# Altium PCB arduinoNano.PcbDoc
Units mm, origin at the board's own origin, x right, y up, seen from the top; angles counter-clockwise.
Board outline 18.54 x 43.18 mm, 2 copper layers (Top Layer, Bottom Layer); 23 components, 42 nets, 160 pads, 35 vias.
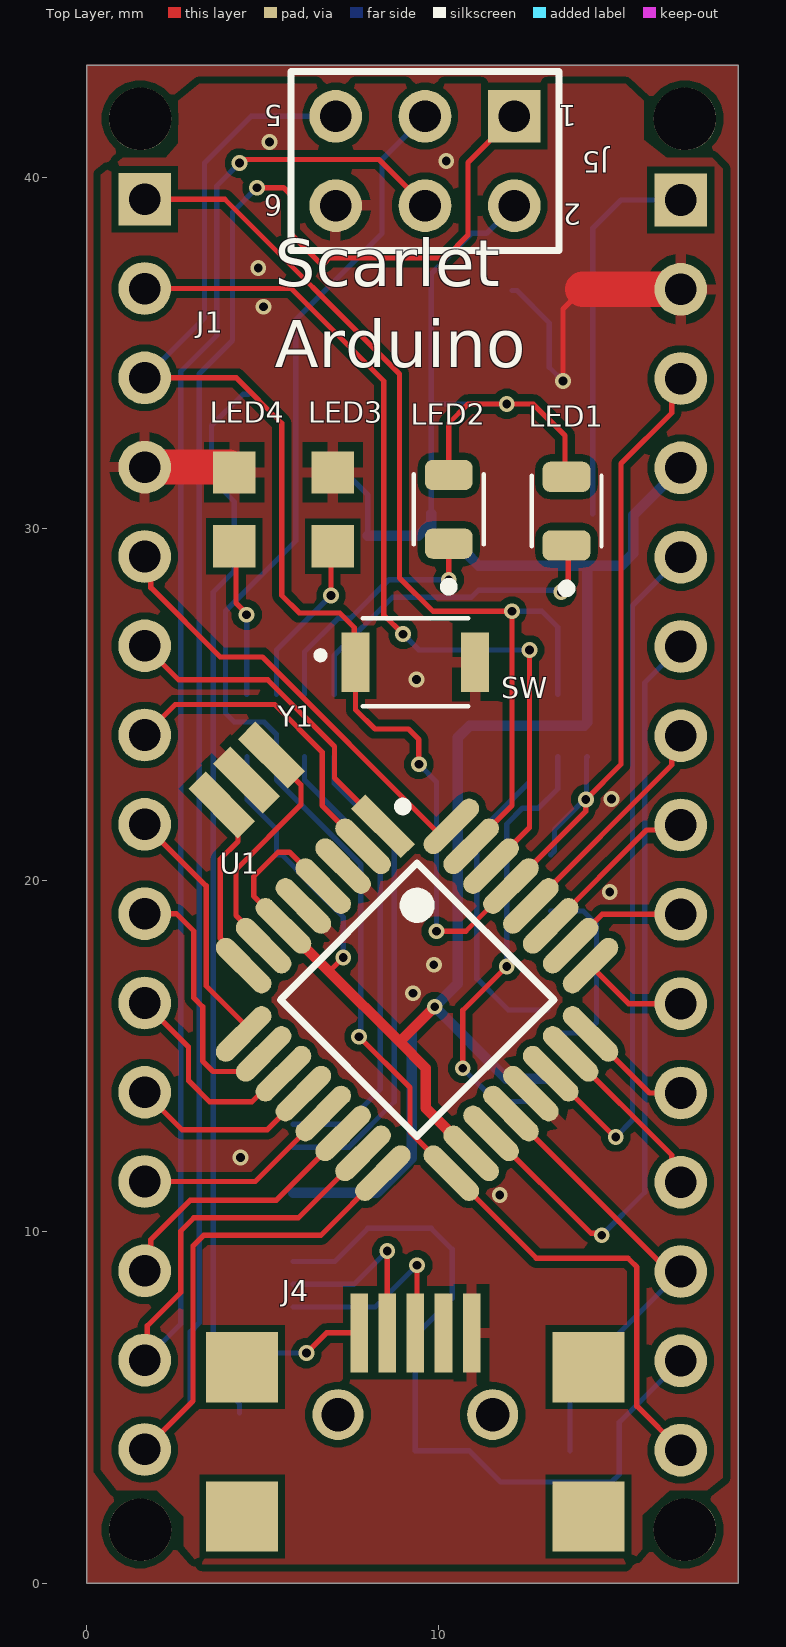
[diagram p0: Top Layer view]
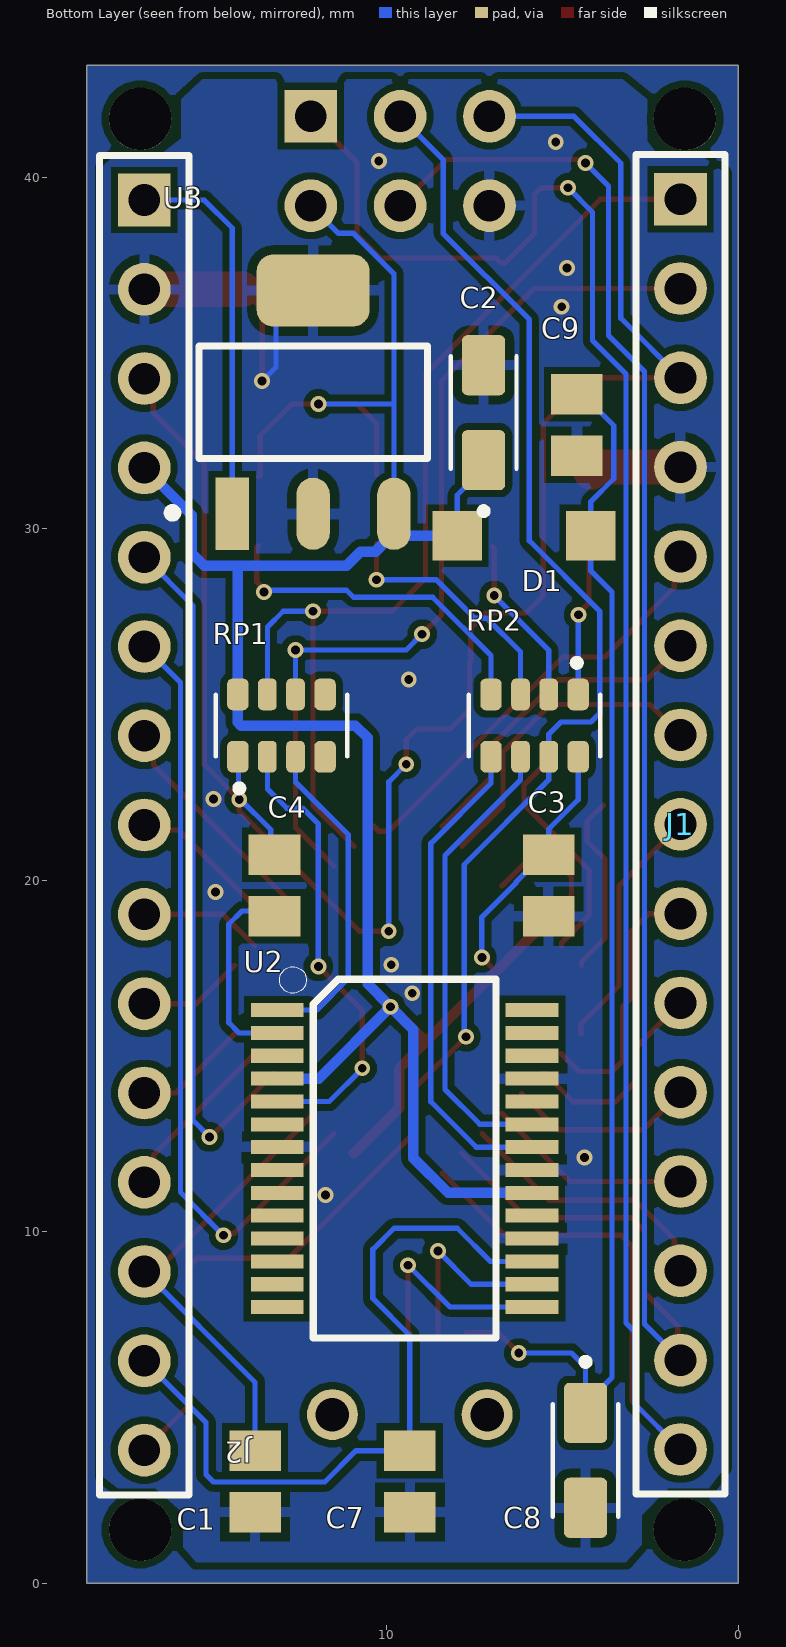
[diagram p1: Bottom Layer view, seen from below]
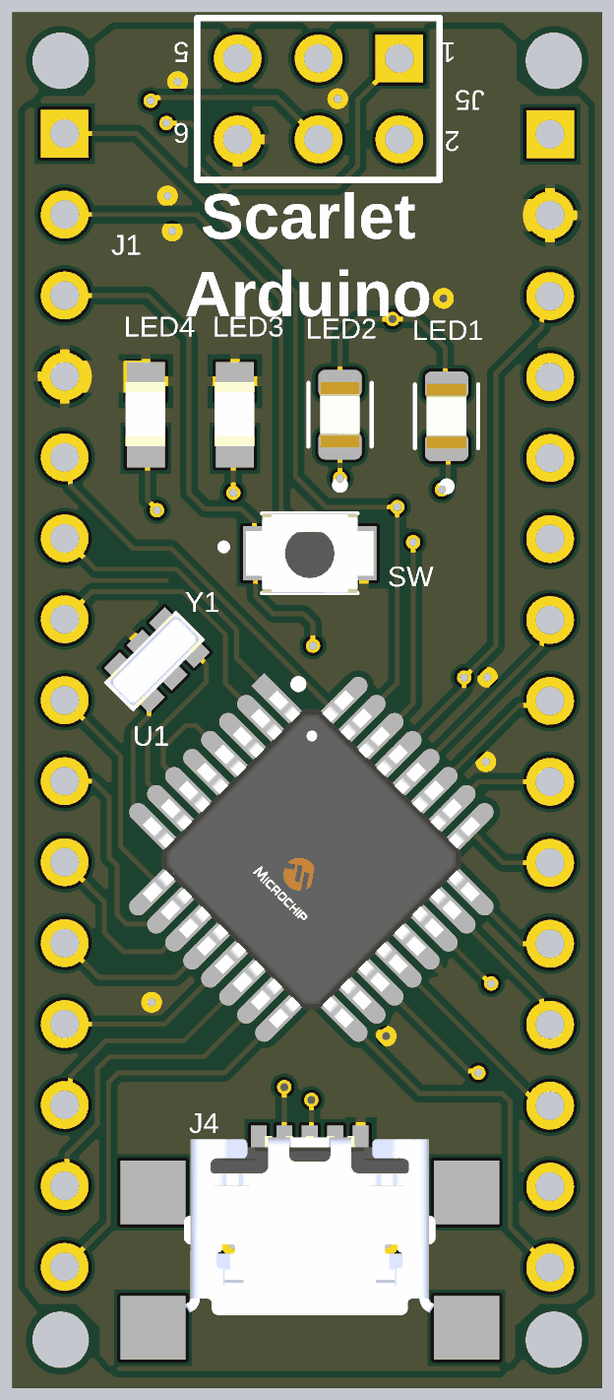
[diagram p2: 3D render of the assembled board from above, using the file's embedded part models]
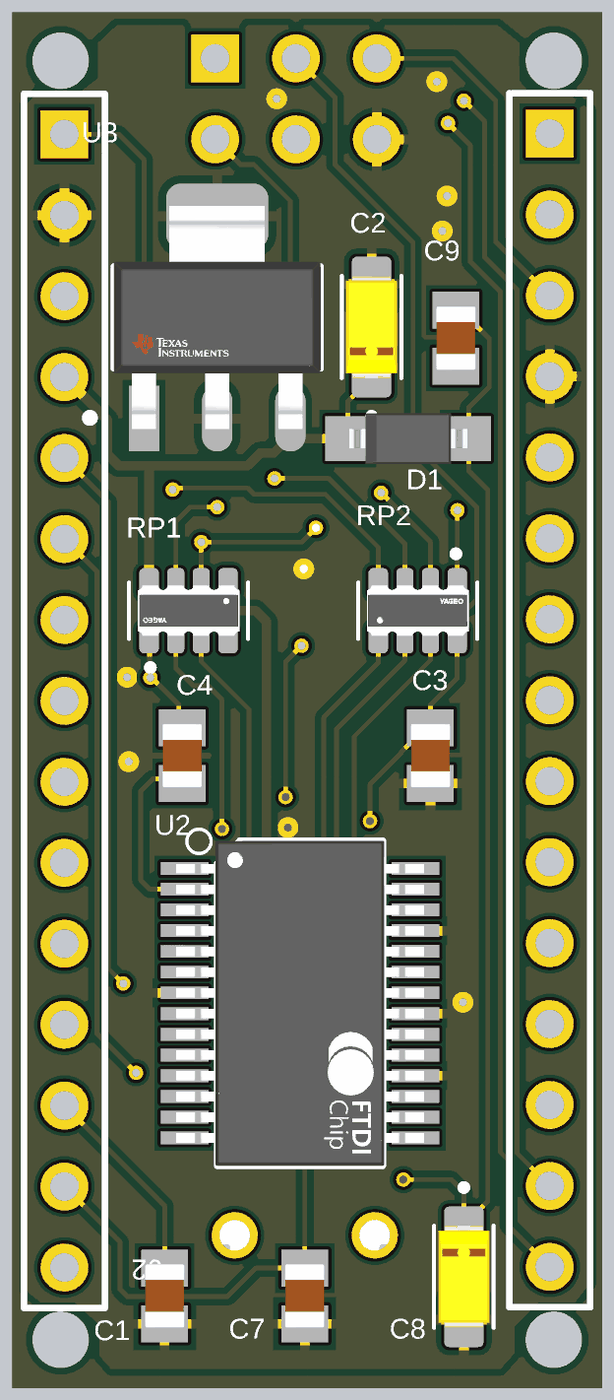
[diagram p3: 3D render of the assembled board from below, using the file's embedded part models]

## Layer stack, top to bottom
Top Solder: solder mask 0.0102, Solder Resist, Dk 3.5
Top Layer: signal copper 0.0356
Dielectric 1: dielectric 0.32, FR-4, Dk 4.8
Bottom Layer: signal copper 0.0356
Bottom Solder: solder mask 0.0102, Solder Resist, Dk 3.5

## Board outline
0,0 18.542,0 18.542,43.18 0,43.18

## Design rules (kind name [scope] priority, off if disabled: settings)
Clearance [All] p1: gap=0.2 ignorepadtopadclearanceinfootprint=FALSE except(0: Arc-Hole Track-Hole SMDPad-Hole THPad-Hole Via-Hole Fill-Hole Poly-Hole Region-Hole Text-Hole)
MinimumSolderMaskSliver [All] p1: minsoldermaskwidth=0
PolygonConnect [All] p1: thpad.connectstyle=Relief thpad.reliefconductorwidth=0.3 thpad.reliefentries=4 thpad.polygonreliefangle="90 Angle" thpad.airgapwidth=0.254 smdpad.connectstyle=Relief smdpad.reliefconductorwidth=0.3 smdpad.reliefentries=4 smdpad.polygonreliefangle="90 Angle" smdpad.airgapwidth=0.254 via.connectstyle=Direct via.reliefconductorwidth=0.254 via.reliefentries=4 via.polygonreliefangle="90 Angle" via.airgapwidth=0.254
RoutingVias [All] p1: holewidth=0.25 width=0.45 viastyle="Through Hole" minholewidth=0.2 minwidth=0.4 maxholewidth=0.7 maxwidth=0.9
SilkToSilkClearance [All] p1: silktosilkclearance=0
SilkToSolderMaskClearance [IsPad] p1: minsilkscreentomaskgap=0 clearancetoexposedcopper=TRUE
SolderMaskExpansion [All] p1: expansion=0.102 istentingtop=FALSE
Width [All] p1: maxlimit=8 minlimit=0.15 preferedwidth=0.15 minimp=50.000000 maximp=50.000000 favimp=50.000000
27 further rules are at their usual default settings.

## Components (designator, comment, footprint, x,y, rotation, side; value= is the part's Value field where it differs from the comment)
C1 "C0805C104K5RACTU" CAPC2012X88N 13.75,2.9 r270 bottom value=0.1uF
C2 "T491A475K010AT, 4.7uF" CAPMP3216X180N 7.25,33.3 r90 bottom value=4.7uF
C3 "C0805C104K5RACTU" CAPC2012X88N 5.4,19.85 r270 bottom value=0.1uF
C4 "C0805C104K5RACTU" CAPC2012X88N 13.2,19.85 r270 bottom value=0.1uF
C7 "C0805C104K5RACTU" CAPC2012X88N 9.35,2.9 r270 bottom value=0.1uF
C8 "T491A475K010AT, 4.7uF" CAPMP3216X180N 4.35,3.5 r270 bottom value=4.7uF
C9 "C0805C104K5RACTU" CAPC2012X88N 4.6,32.95 r270 bottom value=0.1uF
D1 "MBR0520LT1G" SOD3716X117(SOD-123) 6.1,29.75 r180 bottom
J1 "Header 15" HDR1X15 1.651,39.37 r270 bottom
J2 "Header 15" HDR1X15 16.9,39.35 r270 bottom
J4 "67503-1020" 67503-1020 9.35,-1.1 r90 top
J5 "Header 3X2" HDR2X3 12.165,41.729 r180 top
LED1 "APT2012SRCPRV" LEDC2012X75N 13.65,30.5 r90 top
LED2 "APT2012SRCPRV" LEDC2012X75N 10.3,30.55 r90 top
LED3 "APHCM2012SECK-F01" DIOC200X125X110 7,30.55 r270 top
LED4 "LTST-C170TBKT" DIOC200X125X110 4.2,30.55 r270 top
RP1 "YC164-JR-071KL" RESCAXE80P320X160X70-8N 13,24.4 r90 bottom
RP2 "YC164-JR-07680RL" RESCAXE80P320X160X70-8N 5.8,24.4 r270 bottom
SW "B3U-1000P" SW_B3U-1000P 9.35,26.2 r0 top
U1 "ATMEGA168-20AU" Microchip_32A_IPC_A 9.4,16.6 r315 top
U2 "FT232RL" SSOP28-0.65-10.2X5.2MM 9.498,12.083 r270 bottom
U3 "UA78M05CDCYRG3" Texas_Instruments_DCY0004A_IPC_A 12.1,33.6 r90 bottom
Y1 "CSTCE16M0V53" CSTCE16M0V53 4.472,22.824 r225 top

## Footprints (in the part's own frame and the unit in brackets; to place one, negate y for a bottom-side part, rotate by r counter-clockwise, add the part's x,y. Pads: shape width x height; smd on the part's side, far side on the other; paste and mask are expansions set on the pad)
67503-1020 [mm]
  rect 2.25x0.5 smd: 1(8.225,1.6) 2(8.225,0.8) 3(8.225,0) 4(8.225,-0.8) 5(8.225,-1.6)
  round 1.45 hole 0.95: 6(5.9,2.2) 7(5.9,-2.2)
  rect 2x2.05 smd: 8(3,-4.925) 9(7.25,-4.925) 10(7.25,4.925) 11(3,4.925)
  body extent 3.4,-3.95 9.02,3.95, height 2.8
CAPC2012X88N [mm]
  rect 1.16x1.47 smd: 1(-0.875,0) 2(0.875,0)
  body extent -1,-0.63 1,0.63, height 0.88
CAPMP3216X180N [mm]
  rrect25% 1.71x1.23 smd: 1(-1.35,0) 2(1.35,0)
  silkscreen extent -2.9,-0.93 1.6,0.93, body extent -1.6,-0.8 1.6,0.8, height 1.8
CSTCE16M0V53 [mm]
  rect 0.7x2 smd: 1(-1.074,0.037) 2(-0.074,0.037) 3(0.926,0.037)
  body extent -1.6,-0.65 1.6,0.65, height 1
DIOC200X125X110 [mm]
  rect 1.2x1.2 smd: NEG(-1.05,0) POS(1.05,0)
  body extent -1.02,-0.64 0.98,0.61, height 1.1
HDR1X15 [mm] "Connector; Header; 15 Position"
  rect 1.5x1.5 hole 0.9: 1(0,0)
  round 1.5 hole 0.9: 2(2.54,0) 3(5.08,0) 4(7.62,0) 5(10.16,0) 6(12.7,0) 7(15.24,0) 8(17.78,0) 9(20.32,0) 10(22.86,0) 11(25.4,0) 12(27.94,0) 13(30.48,0) 14(33.02,0) 15(35.56,0)
  silkscreen extent -1.27,-1.27 36.83,1.27
HDR2X3 [mm] "Connector; Header; 3x2 Position"
  rect 1.5x1.5 hole 0.9: 1(0,0)
  round 1.5 hole 0.9: 2(0,2.54) 3(2.54,0) 4(2.54,2.54) 5(5.08,0) 6(5.08,2.54)
  silkscreen extent -1.27,-1.27 6.35,3.81
LEDC2012X75N [mm]
  rrect50% 0.86x1.36 smd: A(0.975,0) C(-0.975,0)
  silkscreen extent -2.3,-0.99 1,0.99, body extent -1.02,-0.62 1.02,0.63, height 0.75
Microchip_32A_IPC_A [mm]
  rect 2.004x0.566 smd paste+0 mask+0: 1(-4.175,2.8)
  rrect100% 2.004x0.566 smd paste+0 mask+0: 2(-4.175,2) 3(-4.175,1.2) 4(-4.175,0.4) 5(-4.175,-0.4) 6(-4.175,-1.2) 7(-4.175,-2) 8(-4.175,-2.8) 17(4.175,-2.8) 18(4.175,-2) 19(4.175,-1.2) 20(4.175,-0.4) 21(4.175,0.4) 22(4.175,1.2) 23(4.175,2) 24(4.175,2.8)
  rrect100% 0.566x2.004 smd paste+0 mask+0: 9(-2.8,-4.175) 10(-2,-4.175) 11(-1.2,-4.175) 12(-0.4,-4.175) 13(0.4,-4.175) 14(1.2,-4.175) 15(2,-4.175) 16(2.8,-4.175) 25(2.8,4.175) 26(2,4.175) 27(1.2,4.175) 28(0.4,4.175) 29(-0.4,4.175) 30(-1.2,4.175) 31(-2,4.175) 32(-2.8,4.175)
  silkscreen extent -4.3,-2.75 2.75,3.72, body extent -5.68,-5.68 5.68,5.68, height 0.25
RESCAXE80P320X160X70-8N [mm]
  rrect50% 0.9x0.61 smd: 1(-0.885,1.24) 4(-0.885,-1.24) 5(0.885,-1.24) 8(0.885,1.24)
  rrect50% 0.9x0.53 smd: 2(-0.885,0.4) 3(-0.885,-0.4) 6(0.885,-0.4) 7(0.885,0.4)
  silkscreen extent -1.88,-1.87 0.88,1.87, body extent -0.8,-1.6 0.8,1.6, height 0.7
SOD3716X117(SOD-123) [mm]
  rect 1.4x1.4 smd: 1(-1.9,0.051) 2(1.9,0.051)
  body extent -1.86,-0.75 1.85,0.85, height 1.35
SSOP28-0.65-10.2X5.2MM [mm]
  rect 0.4x1.5 smd: 1(-4.225,-3.625) 2(-3.575,-3.625) 3(-2.925,-3.625) 4(-2.275,-3.625) 5(-1.625,-3.625) 6(-0.975,-3.625) 7(-0.325,-3.625) 8(0.325,-3.625) 9(0.975,-3.625) 10(1.625,-3.625) 11(2.275,-3.625) 12(2.925,-3.625) 13(3.575,-3.625) 14(4.225,-3.625) 15(4.225,3.625) 16(3.575,3.625) 17(2.925,3.625) 18(2.275,3.625) 19(1.625,3.625) 20(0.975,3.625) 21(0.325,3.625) 22(-0.325,3.625) 23(-0.975,3.625) 24(-1.625,3.625) 25(-2.275,3.625) 26(-2.925,3.625) 27(-3.575,3.625) 28(-4.225,3.625)
  silkscreen extent -5.46,-3.56 5.1,2.6, body extent -5.1,-3.9 5.1,3.9, height 2
SW_B3U-1000P [mm]
  rect 0.8x1.7 smd: 1(-1.7,0) 2(1.7,0)
  silkscreen extent -2.8,-1.25 1.5,1.25, body extent -2,-1.25 2,1.25, height 1.75
Texas_Instruments_DCY0004A_IPC_A [mm]
  rect 2.054x0.953 smd paste+0 mask+0: 1(-3.175,2.3)
  rrect100% 2.054x0.953 smd paste+0 mask+0: 2(-3.175,0) 3(-3.175,-2.3)
  rrect46% 2.054x3.212 smd paste+0 mask+0: 4(3.175,0)
  silkscreen extent -3.27,-3.25 1.6,4.13, body extent -3.5,-3.25 3.5,3.25, height 1.8

## Part data
C1 C3 C4 C7 C9: "SMD 0805 CERAMIC X7R -55^+125 100 NF +/-10? 50V", Package=None, Availability=Unavailable, MF="{'manufacturer': u'KEMET'}", MP=C0805C104K5RACTU, Price=None
C2 C8: library part T491A475K010AT, "4.7ÂµF Molded Tantalum Capacitors 25V 1206 (3216 Metric) 6Ohm", Package=None, Availability=Unavailable, MF="{'manufacturer': u'KEMET'}", MP=T491A475K010AT, Price=None
D1: "Surface Mount Schottky Power Rectifier Plastic SODâˆ’123 Package", Package=None, Availability=Unavailable, MF="{'manufacturer': u'ON Semiconductor'}", MP=MBR0520LT1G, Price=None
J1 J2: "Header, 15-Pin", LatestRevisionDate=17-Jul-2002, LatestRevisionNote="Re-released for DXP Platform.", Publisher="Altium Limited"
J4: "<b>0.8mm USB OTG Mini B SMT R/A Sol Tab Molex On-The-Go Series Right Angle SMT Version 2.0 Type B Mini USB Connector,  Receptacle, 30 V ac/dc, 1A</b><p> </b><br><a href=\"<br><a href=\"https://componentsearchengine.com/Images/3/67503-1020.jpg\" title=\"Image\"> <img src=\"https://componentsearchengine.com/Images/3/67503-1020.jpg\" width=\"150\"></a><p> Source: <a href=\"http://docs-europe.electrocomponents.com/webdocs/13c4/0900766b813c46de.pdf\"> Datasheet </a>", Package=None, Availability=Unavailable, MF="{'manufacturer': u'Molex'}", MP=67503-1020, Price=None
J5: "Header, 3-Pin, Dual row", LatestRevisionDate=17-Jul-2002, LatestRevisionNote="Re-released for DXP Platform.", Publisher="Altium Limited"
LED1 LED2: "2.0X1.2MM,RED SMD LED", Package=None, Availability=Unavailable, MF="{'manufacturer': u'Kingbright'}", MP=APT2012SRCPRV, Price=None
LED3: library part LTST-C170TBKT, "Green 2 x 1.25 x 1.1 mm 130Â° Water Clear 35 mcd 2 V Surface Mount LED", Package=None, Availability=Unavailable, MF="{'manufacturer': u'Lite-On Inc.'}", MP=LTST-C170TBKT, Price=None
LED4: "Green 2 x 1.25 x 1.1 mm 130Â° Water Clear 35 mcd 2 V Surface Mount LED", Package=None, Availability=Unavailable, MF="{'manufacturer': u'Lite-On Inc.'}", MP=LTST-C170TBKT, Price=None
RP1 RP2: "Res Thick Film Array 100 Ohm 5% ?200ppm/C ISOL Epoxy 8-Pin 1206(4 X 0603) Convex SMD T/R"
SW: "Switch Tactile N.O. SPST Round Button Gull Wing 0.05A 12VDC 1.5N SMD Embossed T/R", Package=None, Availability=Unavailable, MF="{'manufacturer': u'Omron'}", MP=B3U-1000P, Price=None
U2: Package=None, Availability=Unavailable, MF="{'manufacturer': u'FTDI, Future'}", MP=FT232RL, Price=None
Y1: "<b>CSTCE16M0V53</b> Ceramic Resonator (CERALOCK) 16 MHz Chip Type", Package=None, Availability=Unavailable, MF="{'manufacturer': u'Murata Electronics'}", MP=CSTCE16M0V53, Price=None

## Free pads (board coordinates)
  round 1.778 hole 1.778 unplated paste+0 mask+0: ""(1.524,1.524) ""(1.524,41.656) ""(17.018,1.524) ""(17.018,41.656)

## Via types
v1: diameter 0.45, hole 0.25, Top Layer to Bottom Layer, 35 vias

## Nets (pads, with @x,y where several pads share a name; then routed paths per layer and width w, separated by ;. In a path a pad name is that pad's centre, name@x,y a point inside that pad or via, vN(x,y) a via of type N, cw(c..) or ccw(c..) an arc to the next point about the centre after c; other vN are vias at no path point)
A0: J2.12 U1.23 | length 4.9
  Top Layer w0.15: U1.23 16.642,12.187 16.642,11.668 J2.12
A1: J2.11 U1.24 | length 3.3
  Top Layer w0.15: U1.24 16.01,13.95 J2.11
A2: J2.10 U1.25 | length 3
  Top Layer w0.15: U1.25 15.415,16.49 J2.10
A3: J2.9 U1.26 | length 3.5
  Top Layer w0.15: U1.26 14.658,19.03 J2.9
A4: J2.8 U1.27 | length 4.9
  Top Layer w0.15: U1.27 15.925,21.428 16.758,21.428 J2.8
A5: J2.7 U1.28 | length 6.6
  Top Layer w0.15: U1.28 16.642,23.276 16.642,23.852 J2.7
A6: J2.6 U1.19 | length 22
  Top Layer w0.15: U1.19 14.346,9.957 14.593,9.957 v1(14.65,9.9)
  Bottom Layer w0.15: v1(14.65,9.9) 15.875,11.125 15.875,25.625 J2.6
A7: J2.5 U1.22 | length 19.8
  Top Layer w0.15: U1.22 13.227,14.496 15.024,12.7 v1(15.05,12.7)
  Bottom Layer w0.15: v1(15.05,12.7) 15.525,13.175 15.525,27.815 J2.5
AREF: C1.1 J2.13 U1.20 | length 13.1
  Top Layer w0.15: U1.20 16.564,8.87 J2.13
  Bottom Layer w0.15: C1.1 13.75,5.72 J2.13
D0/RX: J1.2 RP1.6 U1.30 | length 27
  Top Layer w0.15: J1.2 5.82,36.83 8.45,34.2 8.45,27.55 v1(9,27) ; U1.30 12.6,21.497 v1(12.6,26.55)
  Bottom Layer w0.15: v1(9,27) 9.45,26.55 v1(12.6,26.55) RP1.6
D1/TX: J1.1 RP1.7 U1.31 | length 29.3
  Top Layer w0.15: J1.1 3.93,39.37 8.9,34.4 8.9,28.6 9.85,27.65 v1(12.1,27.65) 12.1,22.128 U1.31
  Bottom Layer w0.15: v1(12.1,27.65) 12.95,27.65 13.4,27.2 RP1.7
D2: J1.5 U1.32 | length 12.4
  Top Layer w0.15: J1.5 1.827,29.034 1.827,28.323 3.8,26.35 5,26.35 9.959,21.391 10.231,21.391 U1.32
D3: J1.6 U1.1 | length 9.4
  Top Layer w0.15: J1.6 2.621,25.7 5.15,25.7 7.05,23.8 7.05,22.91 U1.1
D4: J1.7 U1.2 | length 9.1
  Top Layer w0.15: J1.7 2.521,25 5.35,25 6.7,23.65 6.7,22.128 U1.2
D5: J1.8 U1.9 | length 7.1
  Top Layer w0.15: J1.8 3.4,19.841 3.4,17 4.484,15.916 4.484,15.644 U1.9
D6: J1.9 U1.10 | length 7.5
  Top Layer w0.15: J1.9 2.55,19.05 3.05,18.55 3.05,16.65 3.3,16.4 3.3,14.859 3.598,14.561 4.533,14.561 U1.10
D7: J1.10 U1.11 | length 6
  Top Layer w0.15: J1.10 2.9,15.261 2.9,14.3 3.5,13.7 4.7,13.7 5.496,14.496 U1.11
D8: J1.11 U1.12 | length 5.4
  Top Layer w0.15: J1.11 2.721,12.9 5.134,12.9 U1.12
D9: J1.12 U1.13 | length 5.9
  Top Layer w0.15: J1.12 4.796,11.43 U1.13
D10: J1.13 U1.14 | length 7.7
  Top Layer w0.15: J1.13 1.827,9.066 1.827,9.777 2.95,10.9 5.397,10.9 U1.14
D11/MOSI: J1.14 J5.4 U1.15 | length 51.2
  Top Layer w0.15: J1.14 1.725,6.424 1.725,7.325 2.676,8.276 2.676,10.026 3.05,10.4 6.028,10.4 U1.15 ; v1(4.35,40.4) 4.431,40.4 4.531,40.5 8.314,40.5 J5.4
  Bottom Layer w0.15: J1.14 2.676,7.375 2.676,34.476 3.7,35.5 3.7,39.75 v1(4.35,40.4)
D12/MISO: J1.15 J5.1 U1.16 | length 61.6
  Top Layer w0.15: J1.15 3.026,5.185 3.026,9.6 3.326,9.9 6.66,9.9 U1.16 ; v1(4.85,39.7) 5.6,39.7 5.8,39.5 5.8,38.4 6.638,37.562 6.762,37.562 6.9,37.7 10.2,37.7 10.85,38.35 10.85,40.414 J5.1
  Bottom Layer w0.15: J1.15 2.95,5.109 2.95,7.154 3.2,7.404 3.2,34.4 4.15,35.35 4.15,39 v1(4.85,39.7)
D13/SCK: J2.15 J5.3 RP2.7 U1.17 | length 47.7
  Top Layer w0.15: v1(7.75,15.55) 9.2,14.1 9.2,12.84 U1.17 12.79,9.25 15.4,9.25 15.45,9.2 15.65,9 15.65,5.04 J2.15
  Bottom Layer w0.15: v1(7.75,15.55) 7.8,15.6 7.8,20.45 5.4,22.85 RP2.7 5.4,24.15 5.05,24.5 4.2,24.5 3.95,24.75 3.95,27.657 5.95,29.657 5.95,35.95 8.4,38.4 8.4,40.504 J5.3
GND: C1.2 C2.2 C3.2 C7.2 C8.2 C9.2 J1.4 J2.2 J4.5 J5.6 LED3.NEG LED4.NEG SW.2 U1.3 U1.5 U1.21 U2.7 U2.18 U2.21 U2.25 U3.2 U3.4 Y1.2 | length 11.5
  Top Layer w0.15: v1(13.55,34.2) 13.55,36.25 14.11,36.81
  Top Layer w1: J1.4 4.05,31.75 LED4.NEG ; 14.11,36.81 J2.2
  Bottom Layer w0.15: U3.4 12.237,36.775 13.159,35.853 13.159,34.591 v1(13.55,34.2)
  other v1: 11.75,11.05 4.38,12.113 9.281,16.786 9.876,17.597 14.88,19.663 14.93,22.313 9.38,25.713 5.03,36.313 4.88,37.413 10.23,40.463 5.2,41
NetC4_2: C4.2 U2.2 | length 5.8
  Bottom Layer w0.15: U2.2 14.208,15.658 14.5,15.95 14.5,18.75 14.125,19.125 C4.2@13.2,19.125
NetJ4_2: J4.2 U2.16 | length 5.4
  Top Layer w0.15: J4.2 v1(8.55,9.45)
  Bottom Layer w0.15: U2.16 7.608,8.508 v1(8.55,9.45)
NetJ4_3: J4.3 U2.15 | length 6
  Top Layer w0.15: J4.3 9.4,7.175 v1(9.4,9.05)
  Bottom Layer w0.15: U2.15 8.208,7.858 v1(9.4,9.05)
NetLED1_C: LED1.C RP2.4 | length 9.8
  Top Layer w0.15: v1(13.5,28.2) 13.5,28.281 13.7,28.481 13.7,29.475 LED1.C
  Bottom Layer w0.15: RP2.4 7.04,26.39 8.7,28.05 10.95,28.05 11.15,28.25 13.45,28.25 v1(13.5,28.2)
NetLED2_C: LED2.C RP2.3 | length 7.2
  Top Layer w0.15: v1(10.3,28.55) LED2.C
  Bottom Layer w0.15: RP2.3 6.2,26.5 7.15,27.45 7.5,27.45 8.6,28.55 v1(10.3,28.55)
NetLED3_POS: LED3.POS RP2.2 | length 4.9
  Top Layer w0.15: v1(6.95,28.1) 6.95,29.45 LED3.POS
  Bottom Layer w0.15: RP2.2 5.4,26.55 v1(6.95,28.1)
NetLED4_POS: LED4.POS RP2.1 | length 4.4
  Top Layer w0.15: LED4.POS 4.25,29.45 4.25,27.886 4.55,27.586 v1(4.55,27.55)
  Bottom Layer w0.15: v1(4.55,27.55) 4.555,27.545 4.555,25.29 RP2.1
NetRP2_5: RP2.5 U2.22 | length 13.9
  Bottom Layer w0.15: U2.22 7.458,12.408 8.75,13.7 8.75,21.05 7.04,22.76 RP2.5
NetRP2_6: RP2.6 U2.23 | length 13.2
  Bottom Layer w0.15: U2.23 7.358,13.058 8.35,14.05 8.35,20.7 6.2,22.85 RP2.6
NetU1_7: U1.7 Y1.1 | length 6.9
  Top Layer w0.15: U1.7 5.033,18.217 4.25,19 4.25,20.3 6.1,22.15 6.1,22.714 Y1.1
NetU1_8: U1.8 Y1.3 | length 5.2
  Top Layer w0.15: Y1.3 4.303,21.683 4.303,21.103 3.8,20.6 3.8,18.353 4.468,17.685 U1.8
RESET_N: C4.1 J1.3 J2.3 J5.5 RP1.1 SW.1 U1.29 | length 55.3
  Top Layer w0.15: J1.3 4.26,34.29 5.55,33 5.55,28.1 6.05,27.6 7.2,27.6 7.613,27.187 7.613,26.237 SW.1 7.65,24.85 8.2,24.3 9.15,24.3 9.45,24 v1(9.45,23.3) ; v1(9.95,18.55) 10.784,18.55 U1.29 14.2,21.966 v1(14.2,22.3) 15.2,23.3 15.2,31.85 16.645,33.295 16.645,34.015 J2.3
  Bottom Layer w0.15: J1.3 3.35,35.989 3.35,40.4 4.679,41.729 J5.5 ; v1(9.45,23.3) 9.95,22.8 v1(9.95,18.55) ; C4.1 13.306,20.831 13.306,21.442 14.164,22.3 v1(14.2,22.3) ; v1@14.22,22.32 14.22,23.495 RP1.1
RX: RP1.3 U2.1 | length 9.3
  Bottom Layer w0.15: RP1.3 12.6,22.8 11.1,21.3 11.1,17.2 11.992,16.308 U2.1
TX: RP1.2 U2.5 | length 13.1
  Top Layer w0.15: v1(10.7,14.65) 10.7,16.3 v1(11.95,17.55)
  Bottom Layer w0.15: v1(10.7,14.65) 11.642,13.708 U2.5 ; v1(11.95,17.55) 11.95,21.6 12.4,22.05 12.85,22.05 13.4,22.6 RP1.2
VCC_3V3: C7.1 J2.14 U2.17 | length 21.5
  Bottom Layer w0.15: U2.17 7.058,9.158 8,10.1 9.8,10.1 10.4,9.5 10.4,8.1 9.35,7.05 C7.1 10.875,3.775 11.77,2.88 14.93,2.88 15.15,3.1 15.15,4.58 J2.14
VCC_5V: C2.1 C3.1 D1.1 J2.4 J5.2 LED1.A LED2.A RP1.8 RP2.8 U1.4 U1.6 U1.18 U2.4 U2.20 U3.3 | length 83.7
  Top Layer w0.15: U1.6 4.75,19.553 4.75,20.1 5.45,20.8 5.766,20.8 U1.4 ; 6.876,17.426 6.926,17.426 v1(7.3,17.8) ; LED2.A 10.3,33 10.85,33.55 v1(11.95,33.55) 12.7,33.55 13.604,32.646 13.604,31.521 LED1.A
  Top Layer w0.3: U1.6 6.876,17.426 8.901,15.401 ; v1(9.9,16.4) 8.901,15.401 ; U1.18 9.65,13.522 9.65,14.653 8.901,15.401
  Bottom Layer w0.15: RP2.8 4.56,22.29 5.4,21.45 C3.1 5.555,20.725 6.325,19.955 6.325,19.925 7.3,18.95 v1(7.3,17.8) ; C2.1 7.25,31.71 8,30.96 D1.1 ; U3.3 9.8,33.55 ; v1(11.95,33.55) 9.8,33.55 ; J5.2 11.376,38.4 10.95,38.4 9.8,37.25 9.8,33.55
  Bottom Layer w0.3: U2.20 8.258,11.108 9.25,12.1 9.25,15.75 v1(9.9,16.4) ; D1.1 9.429,29.801 U3.3@9.8,30.172 ; U3.3 U3.3@9.8,30.172 ; U2.4 11.942,14.358 v1(9.9,16.4) ; J2.4 15.55,30.38 15.55,29.3 15.2,28.95 14.25,28.95 ; U3.3@9.8,30.172 9.8,29.875 10.325,29.35 10.75,29.35 11.15,28.95 14.25,28.95 ; v1(9.9,16.4) 9.9,16.405 10.55,17.055 10.55,24.05 10.9,24.4 14.15,24.4 14.24,24.49 RP1.8 14.24,28.94 14.25,28.95
VIN: J2.1 U3.1 | length 11
  Bottom Layer w0.15: U3.1 14.4,38.55 15.2,39.35 J2.1
VUSB: C8.1 C9.1 D1.2 J4.1 | length 34.9
  Top Layer w0.15: v1(6.25,6.55) 6.825,7.125 J4.1
  Bottom Layer w0.15: C8.1 4.35,5.108 3.6,5.858 3.6,28.195 4.2,28.795 D1.2 4.2,30.771 3.55,31.421 3.55,32.93 4.445,33.825 C9.1 ; C8.1@4.35,5.4 4.35,6.15 4.75,6.55 v1(6.25,6.55)
pads on no net: J4.4 J4.6 J4.7 J4.8 J4.9 J4.10 J4.11 RP1.4 RP1.5 U2.3 U2.6 U2.8 U2.9 U2.10 U2.11 U2.12 U2.13 U2.14 U2.19 U2.24 U2.26 U2.27 U2.28

## Polygon pours and split planes (outlines as drawn)
no net on Top Layer "NONET_L01_P004" (solid, pour order 4): 0,43.2 18.542,43.2 18.542,0.02 0,0.02
GND on Top Layer "GND_L01_P001" (solid, remove dead copper, pour order 1): 0.4,40.068 1.026,40.55 2.25,40.55 2.6,40.971 2.6,42.168 3.2,42.65 12.831,42.65 15.331,42.65 15.85,42.168 15.85,41.057 16.507,40.55 17.789,40.55 18.1,40.239 18.1,3 17.65,2.65 16.588,2.65 15.8,1.944 15.8,0.971 15.43,0.55 14.05,0.55 3.2,0.55 2.757,1.05 2.757,1.893 2,2.65 0.85,2.65 0.4,3.229 0.4,4.488
no net on Bottom Layer "NONET_L02_P003" (solid, pour order 3): 0,43.18 18.542,43.18 18.542,0 0,0
GND on Bottom Layer "GND_L02_P002" (solid, remove dead copper, pour order 2): 0.4,40.118 1.026,40.6 2.25,40.6 2.6,41.021 2.6,42.218 3.297,42.778 15.247,42.778 15.85,42.218 15.85,41.107 16.507,40.6 17.789,40.6 18.1,40.289 18.1,3.05 17.65,2.7 16.588,2.7 15.8,1.994 15.8,1.021 15.43,0.6 14.05,0.6 3.2,0.6 2.757,1.1 2.757,1.943 2,2.7 0.85,2.7 0.4,3.279 0.4,4.538

## Silkscreen, mask and mechanical layers (free items; w line width, h text height)
Top Overlay:
  text "Scarlet / Arduino" at 5.355,34.15 h2.3
Mechanical 1:
  the board outline again, w0.254

## Text inside footprints (layer, text, board x,y; h text height)
J5: Top Overlay "6" at 5.561,39.697 h1.02 r180; Top Overlay "5" at 5.561,42.237 h1.02 r180; Top Overlay "2" at 14.07,39.443 h1.02 r180; Top Overlay "1" at 13.943,42.237 h1.02 r180